# EAGLE board Solar cell stencil V1.1 (EAGLE 8.3.1)

No outline drawn. Coordinates in mm, seen from the top.
Copper layers (1*16): Top 0.035mm / dielectric 1.5mm / Bottom 0.035mm
Design rules "default": minimum track width 6mil, minimum drill 0.35mm, track to track 6mil, track to pad 6mil, pad to pad 6mil, via to via 6mil, smd to smd 6mil, copper to edge 40mil, drill to drill 6mil, minimum pad ring 10mil, minimum via ring 8mil, stop-mask expansion 4mil, vias tented up to drill 0mil, thermal gap 10mil

## Placement (x,y rotation side)
E$1  [SOLAR_CELL_STENCIL]  0,0 0 top

## Library data of the parts
E$1 = DubSat1 Components

## Text on the board
Document: PLACE CELL EDGE UNDER HOLES | FOR ALLIGNMENT ONLY! | <-- | DO NOT PUT SOLDER PASTE IN CORNER HOLES